# Altium PCB PCB2.PcbDoc
Units mil, origin at the board's own origin, x right, y up, seen from the top; angles counter-clockwise.
Board outline 3460 x 2445 mil, 2 copper layers (Top Layer, Bottom Layer); 24 components, 20 nets, 137 pads, 11 vias.
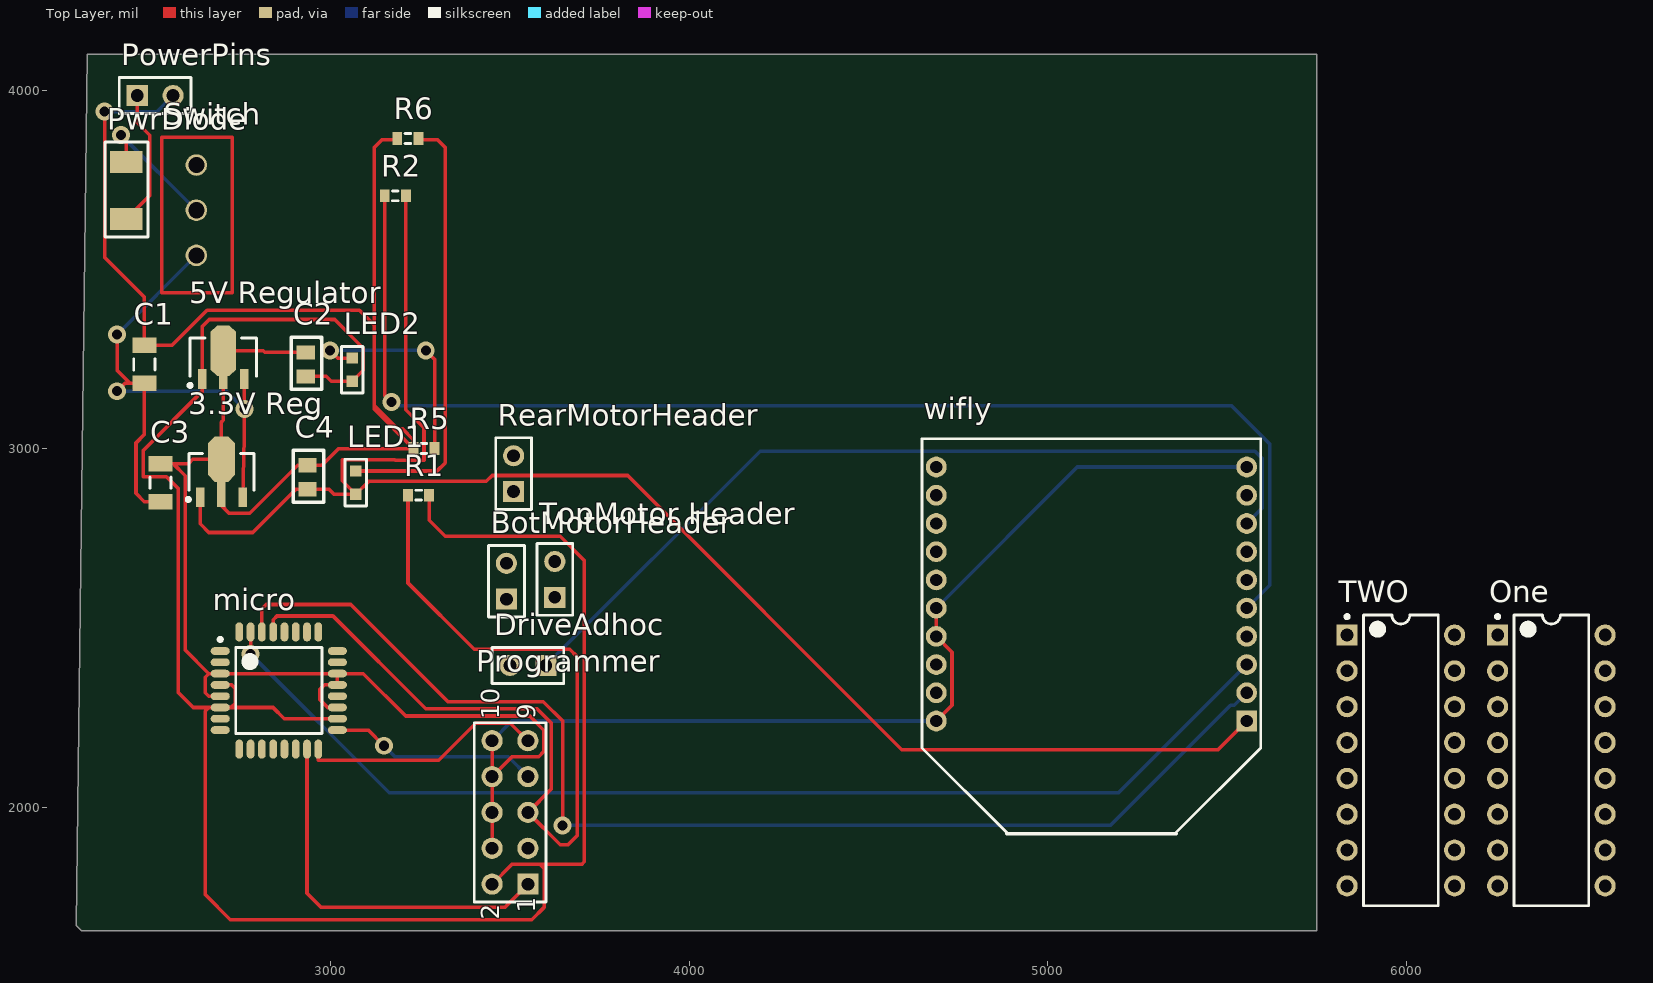
[diagram p0: Top Layer view]
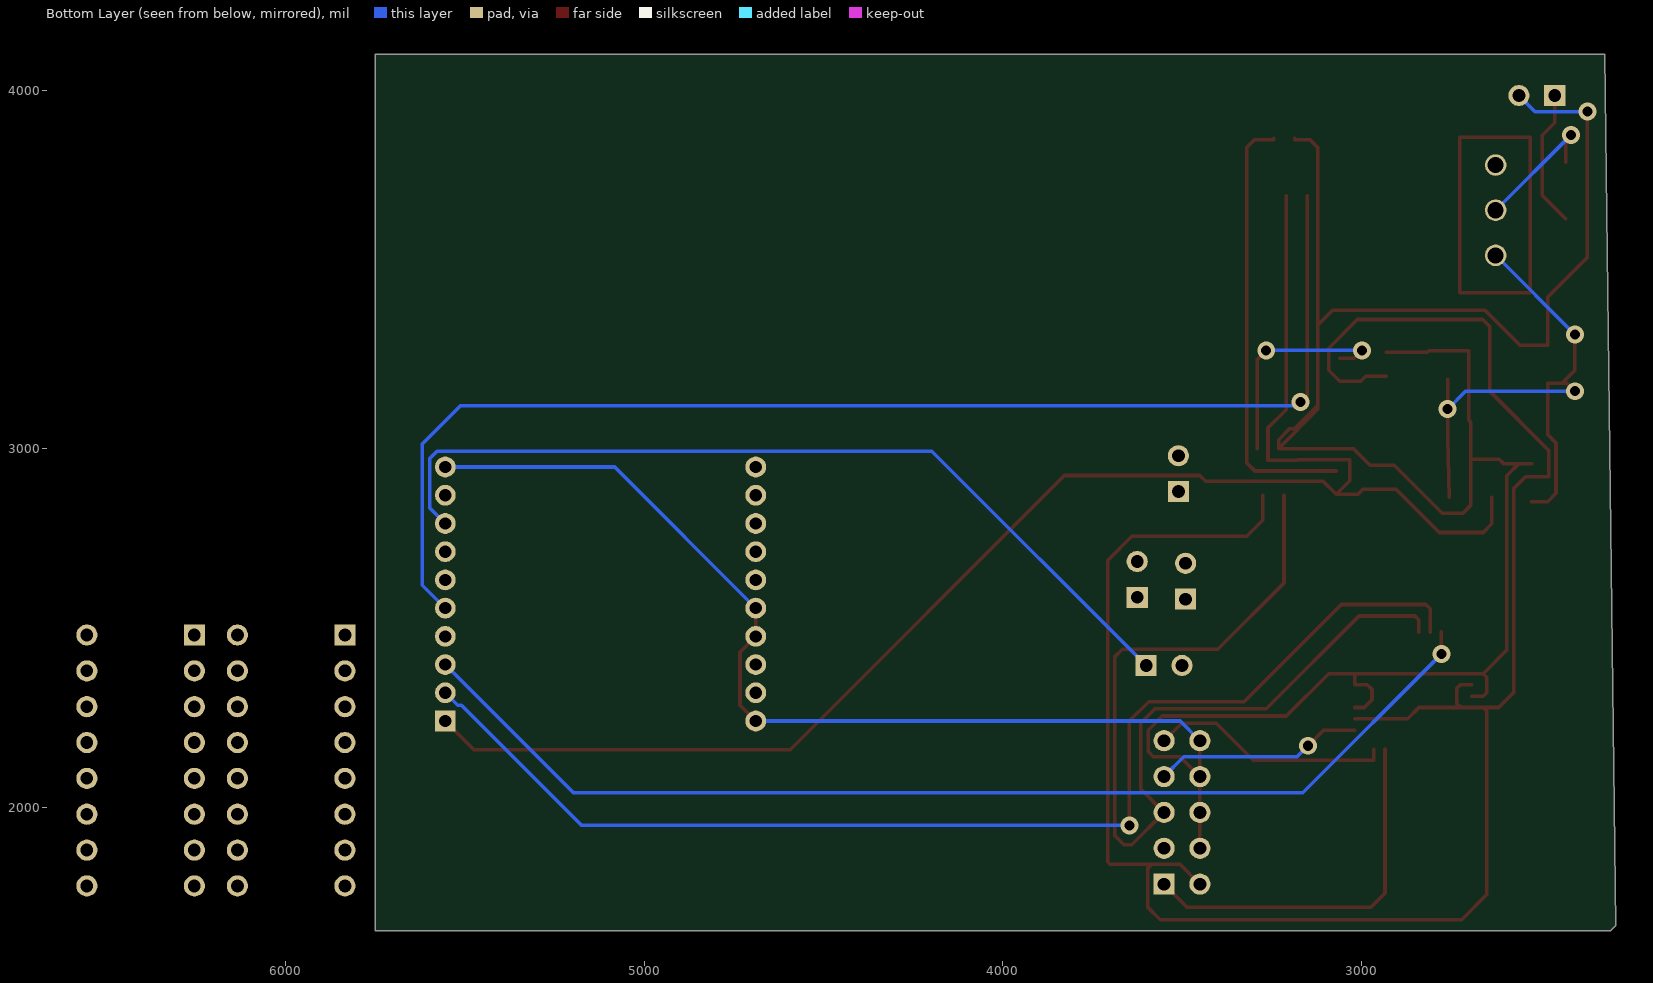
[diagram p1: Bottom Layer view, seen from below]

## Layer stack, top to bottom
Top Layer: signal copper 1.4
Dielectric: dielectric 12.6, FR-4, Dk 4.8
Bottom Layer: signal copper 1.4

## Board outline
2320,4100 5750,4100 5750,1655 2305,1655 2290,1670

## Design rules (kind name [scope] priority, off if disabled: settings)
Clearance [All] p1: gap=10
PolygonConnect [All] p1: connectstyle=Relief reliefconductorwidth=10 reliefentries=4 polygonreliefangle="90 Angle"
RoomDefinition FinalSchematic [InComponentClass('FinalSchematic')] p1: confinementstyle=ConfineIn formatcopy=TRUE lockcomponents=FALSE outline 5795,1715 6595,1715 6595,2650 5795,2650
RoutingVias [All] p1: holewidth=28 width=50 viastyle="Through Hole" minholewidth=28 minwidth=50 maxholewidth=28 maxwidth=50
SilkscreenOverComponentPads [All] p1: minsilkscreentomaskgap=10
SolderMaskExpansion [All] p1: expansion=4
Width [All] p1: maxlimit=10 minlimit=10 preferedwidth=10
27 further rules are at their usual default settings.

## Components (designator, comment, footprint, x,y, rotation, side; value= is the part's Value field where it differs from the comment)
"3.3V Reg" "TO-220 3.3 V Regulator" SOT89-150P410X160-3N 2695,2935 r90 top
"5V Regulator" "5v Regulator" SOT89-150P360X170-3N 2700,3255 r90 top
BotMotorHeader "Header 2" HDR1X2 3490,2580 r90 top
C1 "Cap" C1206 2480,3235 r270 top
C2 "Cap" Capfixed 2930,3235 r270 top
C3 "Cap" C1206 2525,2905 r270 top
C4 "Cap" Capfixed 2935,2920 r270 top
DriveAdhoc "Header 2" HDR1X2 3600,2395 r180 top
LED1 "LED" LEDFixed 3070,2905 r90 top
LED2 "LED" LEDFixed 3060,3220 r90 top
micro "ATmega328-AU" 32A_L 2855,2325 r0 top
One "SN754410" DIP-16 6405,2130 r0 top
PowerPins "Header 2" HDR1X2 2460,3985 r0 top
Programmer "Header 5X2" HDR2X5 3550,1785 r90 top
PwrDiode "DIODE" Diode 2430,3720 r90 top
R1 "Res3" J1-0603 3245,2870 r0 top
R2 "Res3" J1-0603 3180,3705 r0 top
R5 "Res3" J1-0603 3260,3000 r0 top
R6 "Res3" J1-0603 3215,3865 r0 top
RearMotorHeader "Header 2" HDR1X2 3510,2880 r90 top
Switch "Switcheroo" sw 2625,3665 r90 top
"TopMotor Header" "Header 2" HDR1X2 3625,2585 r90 top
TWO "SN754410" DIP-16 5985,2130 r0 top
wifly "RN-XV" XBEE 5555,2240 r90 top

## Footprints (in the part's own frame and the unit in brackets; to place one, negate y for a bottom-side part, rotate by r counter-clockwise, add the part's x,y. Pads: shape width x height; smd on the part's side, far side on the other; paste and mask are expansions set on the pad)
32A_L [mm] "Thin QFP, 32-Leads, Body 7x7mm, Pitch 0.8mm, IPC High Density"
  oval 1.35x0.55 smd: 1(-4.15,2.8) 2(-4.15,2) 3(-4.15,1.2) 4(-4.15,0.4) 5(-4.15,-0.4) 6(-4.15,-1.2) 7(-4.15,-2) 8(-4.15,-2.8) 17(4.15,-2.8) 18(4.15,-2) 19(4.15,-1.2) 20(4.15,-0.4) 21(4.15,0.4) 22(4.15,1.2) 23(4.15,2) 24(4.15,2.8)
  oval 0.55x1.35 smd: 9(-2.8,-4.15) 10(-2,-4.15) 11(-1.2,-4.15) 12(-0.4,-4.15) 13(0.4,-4.15) 14(1.2,-4.15) 15(2,-4.15) 16(2.8,-4.15) 25(2.8,4.15) 26(2,4.15) 27(1.2,4.15) 28(0.4,4.15) 29(-0.4,4.15) 30(-1.2,4.15) 31(-2,4.15) 32(-2.8,4.15)
  silkscreen extent -4.27,-3.05 3.05,3.75, body extent -3.5,-3.5 3.5,3.5, height 1.2
C1206 [mm] "Chip Capacitor, Body 3.2x1.6mm, IPC High Density"
  rect 1.1x1.7 smd: 1(-1.35,0) 2(1.35,0)
  silkscreen extent -0.4,-0.75 0.4,0.75, body extent -1.7,-0.9 1.7,0.9, height 1.3
Capfixed [mm]
  rect 1x1.3 smd: 1(-0.85,0) 2(0.85,0)
  silkscreen extent -1.91,-1.02 1.78,1.14
Diode [mm]
  rect 1.57x2.3 smd: A(-2.01,0) K(2.01,0)
  silkscreen extent -3.3,-1.52 3.43,1.52
DIP-16 [mm] "DIP; 16 Leads; Row Spacing 7.62 mm; Pitch 2.54 mm"
  rect 1.5x1.5 hole 0.9: 1(-3.81,8.89)
  round 1.5 hole 0.9: 2(-3.81,6.35) 3(-3.81,3.81) 4(-3.81,1.27) 5(-3.81,-1.27) 6(-3.81,-3.81) 7(-3.81,-6.35) 8(-3.81,-8.89) 9(3.81,-8.89) 10(3.81,-6.35) 11(3.81,-3.81) 12(3.81,-1.27) 13(3.81,1.27) 14(3.81,3.81) 15(3.81,6.35) 16(3.81,8.89)
  silkscreen extent -3.93,-10.3 2.65,10.31, body extent -3.6,-10.28 3.6,10.28, height 5.08
HDR1X2 [mm] "Connector; Header; 2 Position"
  rect 1.5x1.5 hole 0.9: 1(0,0)
  round 1.5 hole 0.9: 2(2.54,0)
  silkscreen extent -1.27,-1.27 3.81,1.27
HDR2X5 [mm] "Connector; Header; 5x2 Position"
  rect 1.5x1.5 hole 0.9: 1(0,0)
  round 1.5 hole 0.9: 2(0,2.54) 3(2.54,0) 4(2.54,2.54) 5(5.08,0) 6(5.08,2.54) 7(7.62,0) 8(7.62,2.54) 9(10.16,0) 10(10.16,2.54)
  silkscreen extent -1.27,-1.27 11.43,3.81
J1-0603 [mm] "Chip Resistor, Body 1.6x0.8mm, IPC High Density"
  rect 0.7x0.9 smd: 1(-0.75,0) 2(0.75,0)
  silkscreen extent -0.2,-0.35 0.2,0.35, body extent -0.85,-0.48 0.85,0.48, height 0.9
LEDFixed [mm]
  rect 0.8x0.8 smd: A(-0.825,0) K(0.825,0)
  silkscreen extent -1.65,-0.76 1.65,0.76
SOT89-150P360X170-3N [mm] "SOT89, 3-Leads, Body 4.5x2.5mm (max), Pitch 1.50mm, Lead Span 3.6mm, IPC Medium Density"
  rect 1.4x0.6 smd: 1(-1.55,1.5) 3(-1.55,-1.5)
  rect 0.9x0.6 smd: 2(-1.8,0)
  oct 3.6x1.8 smd: 2(0.45,0)
  silkscreen extent -2.12,-2.35 1.35,2.47, body extent -1.35,-2.35 1.35,2.35, height 1.7
SOT89-150P410X160-3N [mm] "SOT89, 3-Leads, Body 4.5x2.4mm (max), Pitch 1.50mm, Lead Span 4.1mm, IPC Medium Density"
  rect 1.4x0.6 smd: 1(-1.8,1.5) 3(-1.8,-1.5)
  rect 1.8x0.6 smd: 2(-1.6,0)
  oct 3.2x1.9 smd: 2(0.9,0)
  silkscreen extent -2.07,-2.3 1.3,2.47, body extent -1.3,-2.3 1.3,2.3, height 1.6
sw [mil]
  round 60 hole 45: 0(0,0) 1(-126,0) 2(126,0)
  Top Layer lines w10: -230,97 203,97 203,-100 -230,-100 -230,97
XBEE [mil]
  rect 58x58 hole 34: 1(0,0)
  round 58 hole 34: 2(78.73,0) 3(157.47,0) 4(236.2,0) 5(314.93,0) 6(393.67,0) 7(472.4,0) 8(551.13,0) 9(629.87,0) 10(708.6,0) 11(708.6,866.07) 12(629.87,866.07) 13(551.13,866.07) 14(472.4,866.07) 15(393.67,866.07) 16(314.93,866.07) 17(236.2,866.07) 18(157.47,866.07) 19(78.73,866.07) 20(0,866.07)
  silkscreen extent -315,-39 787,905

## Part data
BotMotorHeader DriveAdhoc PowerPins RearMotorHeader "TopMotor Header": "Header, 2-Pin"
C1 C2 C3 C4: "Capacitor"
micro: "8-bit AVR Microcontroller, 32KB Flash, 1KB EEPROM, 2KB SRAM, 32-pin TQFP, Industrial Grade (-40°C to 85°C)"
Programmer: "Header, 5-Pin, Dual row"
R1 R2 R5 R6: "Resistor"

## Via types
v1: diameter 50, hole 28, Top Layer to Bottom Layer, 11 vias

## Nets (pads, with @x,y where several pads share a name; then routed paths per layer and width w, separated by ;. In a path a pad name is that pad's centre, name@x,y a point inside that pad or via, vN(x,y) a via of type N, cw(c..) or ccw(c..) an arc to the next point about the centre after c; other vN are vias at no path point)
+3.3V: "3.3V Reg.1" C4.2 LED1.A R2.2 wifly.1 | length 4530.5
  Top Layer w10: 2635.94,2864.13 2635.94,2790.06 2660,2766 2782.46,2766 2903,2886.54 C4.2 2995,2886.54 3009.02,2872.52 LED1.A ; R2.2 3209.53,3108.47 3260,3058 3260,2967 3181,2967 3179,2969 3032,2969 3032,2910.52 LED1.A ; wifly.1 5475,2160 4593,2160 3828,2925 3450,2925 3434,2909 3106.48,2909 LED1.A
+5V: "5V Regulator.1" C2.2 LED2.A micro.4 micro.6 micro.18 Programmer.2 R1.2 | length 5788.9
  Top Layer w10: micro.4 2723.25,2340.75 2734,2330 2734,2290 2721.76,2277.76 ; C2.2 2987,3201.54 3001.02,3187.52 LED2.A 3091,3218.52 3091,3280 3011,3360 2660.94,3360 2640.94,3340 2640.94,3193.98 2640.94,3159.22 2476.53,2994.81 2476.53,2921.49 2541.51,2921.49 2574,2889 2574,2320 2616.24,2277.76 2660,2277.76 ; micro.18 2870.5,2246.26 2839,2277.76 2721.76,2277.76 ; R1.2 3274.53,2800 3319.53,2755 3640,2755 3707,2688 3707,1847 3700,1840 3585,1840 ; Programmer.2 3505,1840 3585,1840 ; 2660,2277.76 micro.6 2721.76,2277.76 ; 2660,2277.76 2650,2267.76 2650,1756 2720,1686 3561,1686 3595,1720 3595,1830 3585,1840
+6V: PowerPins.1 PwrDiode.A | length 385.6
  Top Layer w10: PwrDiode.A 2495,3705.87 2495,3874 2460,3909 PowerPins.1
ADHOC_EN: DriveAdhoc.1 wifly.8 | length 2454.5
  Bottom Layer w10: DriveAdhoc.1 4198,2993 5578,2993 5599,2972 5599,2835.13 wifly.8
BOTTOMMOTOR: micro.9
GND: "3.3V Reg.2" "5V Regulator.2" C1.1 C2.1 C3.1 C4.1 micro.3 micro.5 micro.19 micro.21 micro.22 PowerPins.2 Programmer.4 Programmer.6 Programmer.8 Programmer.10 R5.1 R6.1 wifly.10 wifly.16 wifly.17 wifly.20 | length 9309.8
  Top Layer w10: v1(2369,3940) 2369,3534 2480,3423 C1.1 2557,3288.15 2654.85,3386 3080,3386 3121,3345 ; C3.1 2560,2958.15 ; micro.5 2660,2309.25 2650,2319.25 2650,2362.24 2659.88,2372.12 ; C2.1 2816.25,3268.46 2812,3272.72 2700,3272.72 2700,3184.13 2700,3079 2695,3074 2695,2970.43 ; micro.19 2991.56,2277.76 2970,2299.32 2970,2328 2982.75,2340.75 micro.21 micro.22 ; R6.1 3185.47,3861 3142,3861 3121,3840 3121,3345 ; Programmer.4 Programmer.6 Programmer.8 ; Programmer.10 Programmer.8 ; wifly.20 4733,2284.07 4733,2432.13 wifly.17 wifly.16 ; 2560,2958.15 2603,2958.15 2615.28,2970.43 2695,2970.43 ; 2560,2958.15 2594,2924.15 2594,2438 2659.88,2372.12 ; 2659.88,2372.12 2660,2372.24 micro.3 ; 2659.88,2372.12 micro.3 ; micro.3 micro.22 ; 2695,2970.43 2695,2921 2695,2872.01 2695,2841 2716,2820 2774,2820 2907.46,2953.46 C4.1 2975.7,2953.46 3022.24,3000 R5.1 ; micro.22 3091,2372.24 3209.24,2254 3555,2254 3594.53,2214.47 3594.53,2155 3580,2140.47 3505.47,2140.47 Programmer.8 ; 3121,3120 3121,3109.47 R5.1 ; 3121,3120 3186,3055 3200,3055 3230.47,3024.53 R5.1 ; 3121,3120 3121,3345
  Bottom Layer w10: v1(2369,3940) 2515,3940 PowerPins.2 ; Programmer.10 3505,2240 wifly.20 ; wifly.16 5082.6,2948.6 wifly.10
HBRIDGE1: micro.13
HBRIDGE2: micro.14
MISO: micro.16 Programmer.9 | length 679.3
  Top Layer w10: micro.16 2965.24,2130.3 3300.93,2130.3 3404.63,2234 3501,2234 Programmer.9
MOSI: micro.15 Programmer.1 | length 1061.4
  Top Layer w10: micro.15 2933.74,1760 2973.74,1720 3485,1720 Programmer.1
"Net3.3V Reg_3": "3.3V Reg.3" "5V Regulator.3" C1.2 C3.2 Switch.1 | length 1648.8
  Top Layer w10: v1(2404,3160) 2425.85,3181.85 2440,3181.85 ; v1(2404,3318) 2404,3217.85 2440,3181.85 ; C3.2 2480,2851.85 2456.53,2875.32 2456.53,3015.69 2480,3039.16 C1.2 2440,3181.85 ; 2754.06,2864.13 2759.06,3031 v1(2759.06,3110) 2759.06,3193.98
  Bottom Layer w10: v1(2404,3160) 2709.06,3160 v1(2759.06,3110) ; v1(2404,3318) Switch.1
NetLED1_K: LED1.K R6.2 | length 1225.5
  Top Layer w10: LED1.K 3296.48,2937.48 3319,2960 3319,3840 3298,3861 3244.53,3861 R6.2
NetLED2_K: LED2.K R5.2 | length 622.1
  Top Layer w10: v1(2998,3274) 3019.52,3252.48 LED2.K ; v1(3265,3274) 3289.53,3249.47 R5.2
  Bottom Layer w10: v1(2998,3274) v1(3265,3274)
NetPwrDiode_K: PwrDiode.K Switch.0 | length 379.1
  Top Layer w10: v1(2415,3875) 2430,3860 PwrDiode.K
  Bottom Layer w10: v1(2415,3875) Switch.0
NetR2_1: R2.1 wifly.5 | length 3566
  Top Layer w10: R2.1 3150.47,3148 v1(3169,3129.47)
  Bottom Layer w10: v1(3169,3129.47) 3179.47,3119 5513,3119 5619,3013 5619,2618.93 wifly.5
RESET: micro.29 Programmer.5 R1.1 | length 2699.8
  Top Layer w10: micro.29 2839.25,2522.25 2850,2533 3006,2533 3265,2274 3575.53,2274 3614.53,2235 3614.53,2049.53 Programmer.5 3640,1895 3662,1895 3687,1920 3687,2420 3667,2440 3400.47,2440 3215.47,2625 R1.1
RX_ATM: micro.30 wifly.2 | length 3395.5
  Top Layer w10: micro.30 2807.76,2552.76 2820,2565 3056,2565 3327,2294 3593,2294 3647,2240 v1(3647,1949)
  Bottom Layer w10: v1(3647,1949) 5175,1949 5510,2284 5520.27,2284 wifly.2
SCK: micro.17 Programmer.7 | length 585.4
  Top Layer w10: micro.17 3104.24,2214.76 v1(3148,2171)
  Bottom Layer w10: v1(3148,2171) 3179,2140 3495,2140 Programmer.7
TOPMOTOR: micro.10
TX_ATM: micro.31 wifly.3 | length 3148.5
  Top Layer w10: v1(2776.26,2427) micro.31
  Bottom Layer w10: v1(2776.26,2427) 3163.26,2040 5197.53,2040 wifly.3
pads on no net: "TopMotor Header.1" "TopMotor Header.2" BotMotorHeader.1 BotMotorHeader.2 DriveAdhoc.2 micro.1 micro.2 micro.7 micro.8 micro.11 micro.12 micro.20 micro.23 micro.24 micro.25 micro.26 micro.27 micro.28 micro.32 One.1 One.2 One.3 One.4 One.5 One.6 One.7 One.8 One.9 One.10 One.11 One.12 One.13 One.14 One.15 One.16 Programmer.3 RearMotorHeader.1 RearMotorHeader.2 Switch.2 TWO.1 TWO.2 TWO.3 TWO.4 TWO.5 TWO.6 TWO.7 TWO.8 TWO.9 TWO.10 TWO.11 TWO.12 TWO.13 TWO.14 TWO.15 TWO.16 wifly.4 wifly.6 wifly.7 wifly.9 wifly.11 wifly.12 wifly.13 wifly.14 wifly.15 wifly.18 wifly.19

## Text inside footprints (layer, text, board x,y; h text height)
Programmer: Top Overlay "10" at 3470,2245 h50 r90; Top Overlay "9" at 3570,2245 h50 r90; Top Overlay "1" at 3570,1705 h50 r90; Top Overlay "2" at 3470,1685 h50 r90